# Altium PCB Optokoppleradapter_Spannungsmessung_V1_2.PcbDoc
Units mil, origin at the board's own origin, x right, y up, seen from the top; angles counter-clockwise.
Board outline 880 x 868 mil, 2 copper layers (Top, Bottom), stack 61.811 mil thick; 30 components, 20 nets, 65 pads, 0 vias.
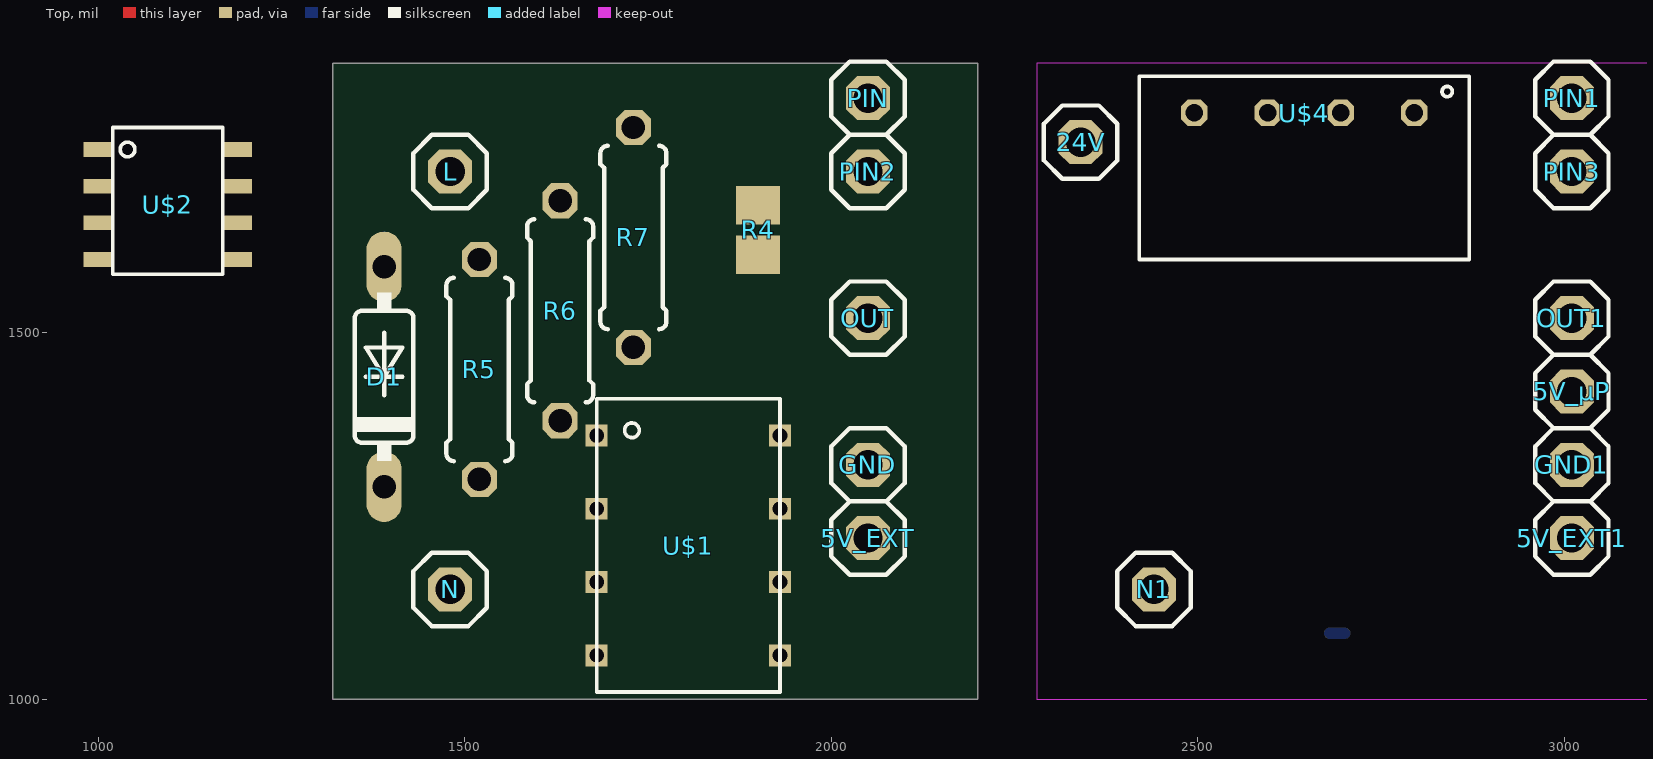
[diagram p0: Top view]
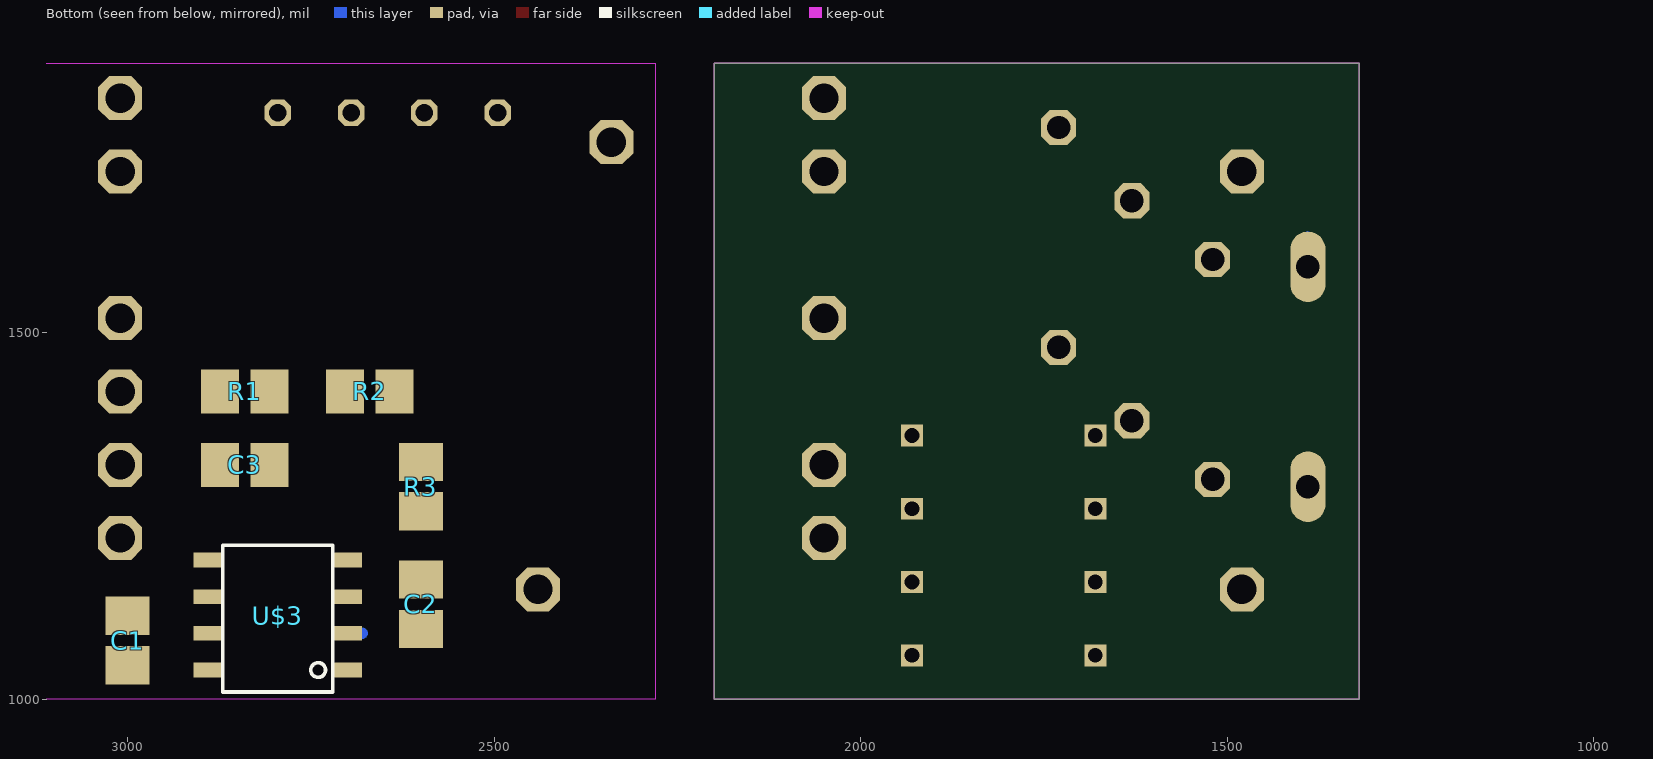
[diagram p1: Bottom view, seen from below]

## Layer stack, top to bottom
Top Solder: solder mask 0.4, Solder Resist, Dk 3.5
Top: signal copper 1.378
Dielectric 1: core 59.0551, FR-4, Dk 4.8
Bottom: signal copper 1.378
Bottom Solder: solder mask 0.4, Solder Resist, Dk 3.5

## Board outline
1320,1000 2200,1000 2200,1868 1320,1868
cut-out: 2280,1000 3160,1000 3160,1868 2280,1868

## Design rules (kind name [scope] priority, off if disabled: settings)
Clearance mdViaVia [IsVia vs IsVia] p1: gap=8
Clearance mdPadVia [IsPad vs IsVia] p2: gap=8
Clearance mdPadPad [IsPad vs IsPad] p3: gap=8
Clearance mdWireVia [(InLayerClass('Signal Layers') AND IsTrack) vs IsVia] p4: gap=8
Clearance mdWirePad [(InLayerClass('Signal Layers') AND IsTrack) vs IsPad] p5: gap=8
Clearance mdWireWire [(InLayerClass('Signal Layers') AND IsTrack) vs (InLayerClass('Signal Layers') AND IsTrack)] p6: gap=8
Clearance [All] p7: gap=8
HoleSize [All] p1: absolutevalues=TRUE maxlimit=100000 minlimit=24 maxpercent=80.000 minpercent=20.000
HoleToHoleClearance [All] p1: gap=8 allowstackedmicrovias=TRUE
PolygonConnect ThermalVias [IsVia] p1: connectstyle=Direct reliefconductorwidth=10 reliefentries=4 polygonreliefangle="90 Angle" airgapwidth=10
PolygonConnect [All] p2: connectstyle=Relief reliefconductorwidth=10 reliefentries=4 polygonreliefangle="90 Angle" airgapwidth=10
RoutingVias [All] p1: holewidth=28 width=50 viastyle="Through Hole" minholewidth=28 minwidth=50 maxholewidth=28 maxwidth=50
SilkToSilkClearance [All] p1 off: silktosilkclearance=10
SilkToSolderMaskClearance [IsPad] p1 off: minsilkscreentomaskgap=10 clearancetoexposedcopper=TRUE
SolderMaskExpansion [All] p1: expansion=4
UnpouredPolygon [All] p1: allowunpoured=FALSE
Width [All] p1: maxlimit=100000 minlimit=10 preferedwidth=10
25 further rules are at their usual default settings.

## Components (designator, comment, footprint, x,y, rotation, side; value= is the part's Value field where it differs from the comment)
5V_EXT "" 1X01 2050,1220 r90 top
5V_EXT1 "" 1X01 3010,1220 r0 top
5V_µP "" 1X01 3010,1420 r0 top
24V "" 1X01 2340,1760 r0 top
C1 "100n" C0805 3000,1080 r90 bottom
C2 "220n" C0805 2600,1130 r270 bottom
C3 "100n" C0805 2840,1320 r0 bottom
D1 "1N4007" DO35-7 1390,1440 r90 top
GND "" 1X01 2050,1320 r0 top
GND1 "" 1X01 3010,1320 r0 top
L "" 1X01 1480,1720 r90 top
N "" 1X01 1480,1150 r90 top
N1 "" 1X01 2440,1150 r90 top
OUT "" 1X01 2050,1520 r90 top
OUT1 "" 1X01 3010,1520 r0 top
PIN "" 1X01 2050,1820 r0 top
PIN1 "" 1X01 3010,1820 r0 top
PIN2 "" 1X01 2050,1720 r0 top
PIN3 "" 1X01 3010,1720 r0 top
R1 "30k" R0805 2840,1420 r0 bottom
R2 "220k" R0805 2670,1420 r180 bottom
R3 "220k" R0805 2600,1290 r90 bottom
R4 "100R" R0805 1900,1640 r90 top
R5 "820k" 0207/7 1520,1450 r90 top
R6 "10k" 0207/7 1630,1530 r270 top
R7 "30k" 0207/7 1730,1630 r270 top
U$1 "" DIP8 1680,1010 r0 top
U$2 "" SOIC_N 1020,1580 r0 top
U$3 "" SOIC_N 2720,1210 r0 bottom
U$4 "" 4PIN_SIP 2870,1850 r180 top

## Footprints (in the part's own frame and the unit in brackets; to place one, negate y for a bottom-side part, rotate by r counter-clockwise, add the part's x,y. Pads: shape width x height; smd on the part's side, far side on the other; paste and mask are expansions set on the pad)
1X01 [mil] "1X01"
  oct 60x60 hole 40: 1(0,0)
  silkscreen extent -50,-50 50,50
4PIN_SIP [mil] "4PIN_SIP"
  oct 36x36 hole 24: VIN+(175,50) VIN-(75,50) VOUT+(375,50) VOUT-(275,50)
  silkscreen extent 0,0 450,250
0207/7 [mil] "0207/7"
  oct 48x48 hole 32: 1(-150,0) 2(150,0)
  silkscreen extent -125,-45 125,45
C0805 [mil] "C0805"
  rect 52x60 smd: 1(-33.46,0) 2(34,0)
DIP8 [mil] "DIP8"
  rect 30x30 hole 20: P$1(0,350) P$2(0,250) P$3(0,150) P$4(0,50) P$5(250,50) P$6(250,150) P$7(250,250) P$8(250,350)
  silkscreen extent 0,0 250,400
DO35-7 [mil] "DO35-7"
  oval 96x48 hole 32: A(150,0) C(-150,0)
  silkscreen extent -115,-40 115,40
R0805 [mil] "R0805"
  rect 52x60 smd: 1(-33.46,0) 2(34,0)
SOIC_N [mil] "SOIC_N"
  rect 40x20 smd: P$1(-20,170) P$2(-20,120) P$3(-20,70) P$4(-20,20) P$5(170,20) P$6(170,70) P$7(170,120) P$8(170,170)
  silkscreen extent 0,0 150,200

## Part data
5V_EXT 5V_EXT1 5V_µP 24V GND GND1 L N N1 OUT OUT1 PIN PIN1 PIN2 PIN3: library part 1X01
C1 C2 C3: library part C0805
D1: library part DO35-7
R1 R2 R3 R4: library part R0805
R5 R6 R7: library part 0207/7
U$1: library part DIP8
U$2 U$3: library part SOIC_N
U$4: library part 4PIN_SIP

## Nets (pads, with @x,y where several pads share a name; then routed paths per layer and width w, separated by ;. In a path a pad name is that pad's centre, name@x,y a point inside that pad or via, vN(x,y) a via of type N, cw(c..) or ccw(c..) an arc to the next point about the centre after c; other vN are vias at no path point)
5V_EXTERN: 5V_EXT.1 U$2.P$7
5V_EXTERN1: 5V_EXT1.1 U$1.P$3 U$4.VOUT+
5V_µP: 5V_µP.1 C1.1 U$1.P$6 U$3.P$7
24V: 24V.1 U$4.VIN+
GND: GND.1
GND1: C1.2 C3.2 GND1.1 R1.2 U$3.P$4 U$4.VIN-
L: D1.A L.1 | length 40
  Bottom w16: D1.A D1.A@1390,1630
N: N.1 R6.1 R7.2 U$2.P$4
N1: N1.1 U$1.P$1 U$4.VOUT-
N$1: D1.C R5.2
N$2: R5.1 R6.2 U$2.P$3
N$3: PIN1.1 U$1.P$4
N$4: PIN.1 R7.1 U$2.P$2
N$5: R4.1 U$2.P$6
N$6: PIN2.1 R4.2
N$7: PIN3.1 U$1.P$2 | length 14.1
  Bottom w16: PIN3.1@3000,1730 PIN3.1
N$10: R1.1 R2.1 U$1.P$5
N$11: C2.1 R2.2 R3.1
N$12: C3.1 R3.2 U$3.P$3
OUT1: C2.2 OUT1.1 U$3.P$2 U$3.P$6 | length 20
  Bottom w16: U$3.P$2@2680,1090 U$3.P$2
pads on no net: OUT.1 U$1.P$7 U$1.P$8 U$2.P$1 U$2.P$5 U$2.P$8 U$3.P$1 U$3.P$5 U$3.P$8

## Keep-outs
Keep-Out Layer:
  the board outline again, w0

## Silkscreen, mask and mechanical layers (free items; w line width, h text height)
Dimension:
  lines w0: 1320,1000 2200,1000 2200,1868 1320,1868 1320,1000 ; 2280,1000 3160,1000 3160,1868 2280,1868 2280,1000
Unrouted:
  lines w0: 1000,1600 1630,1680 1730,1480 1480,1150 ; 1000,1650 1520,1300 1630,1380 ; 1000,1700 1730,1780 2050,1820 ; 1190,1650 1900,1607 ; 1190,1700 2050,1220 ; 1390,1290 1520,1600 ; 1390,1630 1480,1720 ; 1680,1060 3010,1820 ; 1680,1160 2495,1800 3010,1220 ; 1680,1260 3000,1730 ; 1680,1360 2440,1150 2595,1800 ; 1900,1674 2050,1720 ; 1930,1060 2704,1420 2807,1420 ; 1930,1160 2890,1090 ; 2340,1760 2695,1800 ; 2600,1097 2680,1090 ; 2600,1164 2600,1257 2637,1420 ; 2600,1324 2807,1320 2700,1140 ; 2700,1090 2890,1140 3010,1520 ; 2700,1190 2874,1320 ; 2795,1800 2874,1420 2874,1320 ; 3000,1047 2890,1090 ; 3000,1114 3010,1320 2874,1320 ; 3010,1420 2890,1090